# Altium PCB Wristband-EH-v1.PcbDoc
Units mil, origin at the board's own origin, x right, y up, seen from the top; angles counter-clockwise.
Board outline 1000 x 930 mil, 2 copper layers (Top Layer, Bottom Layer); 25 components, 16 nets, 85 pads, 13 vias.
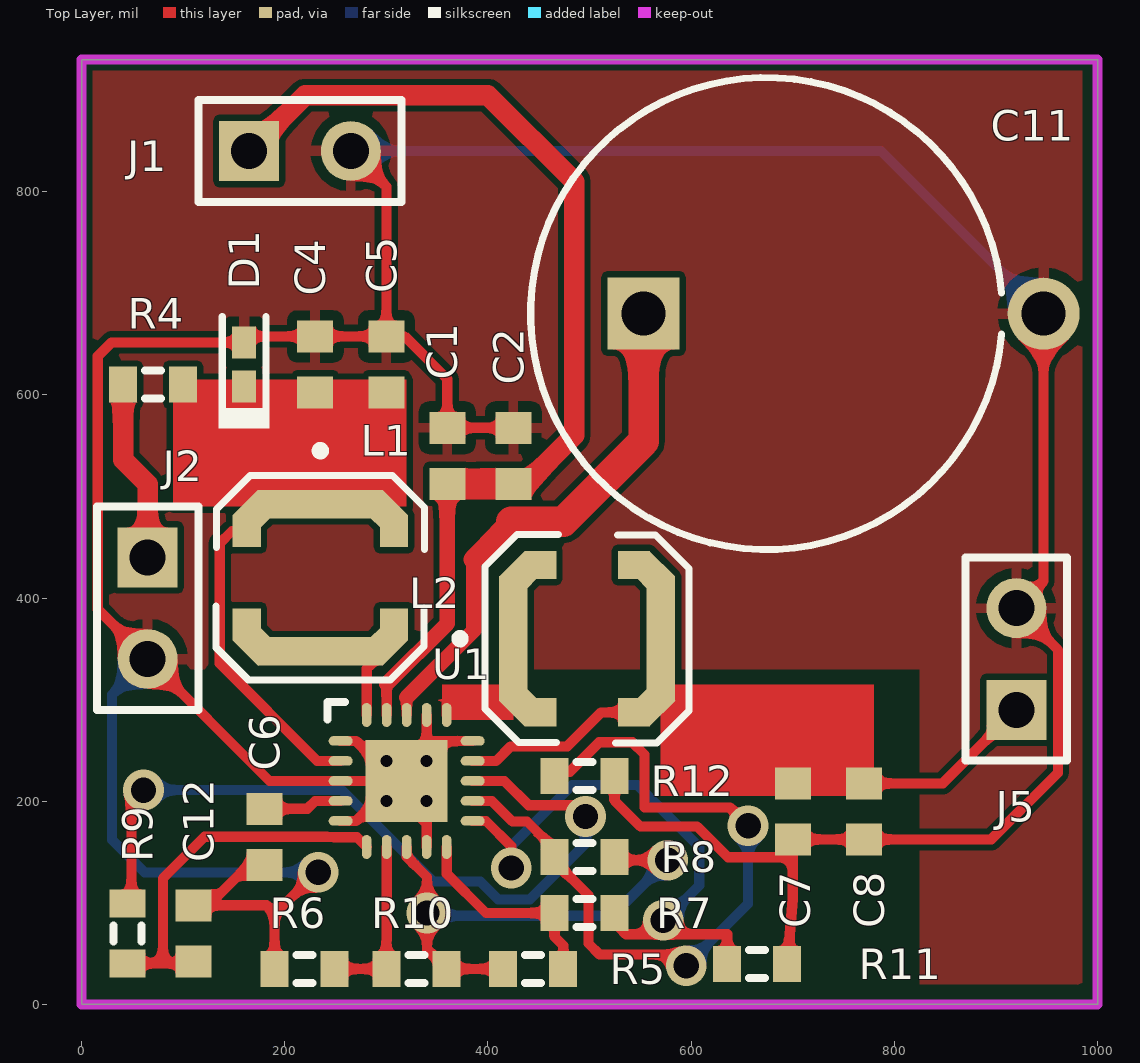
[diagram p0: Top Layer view]
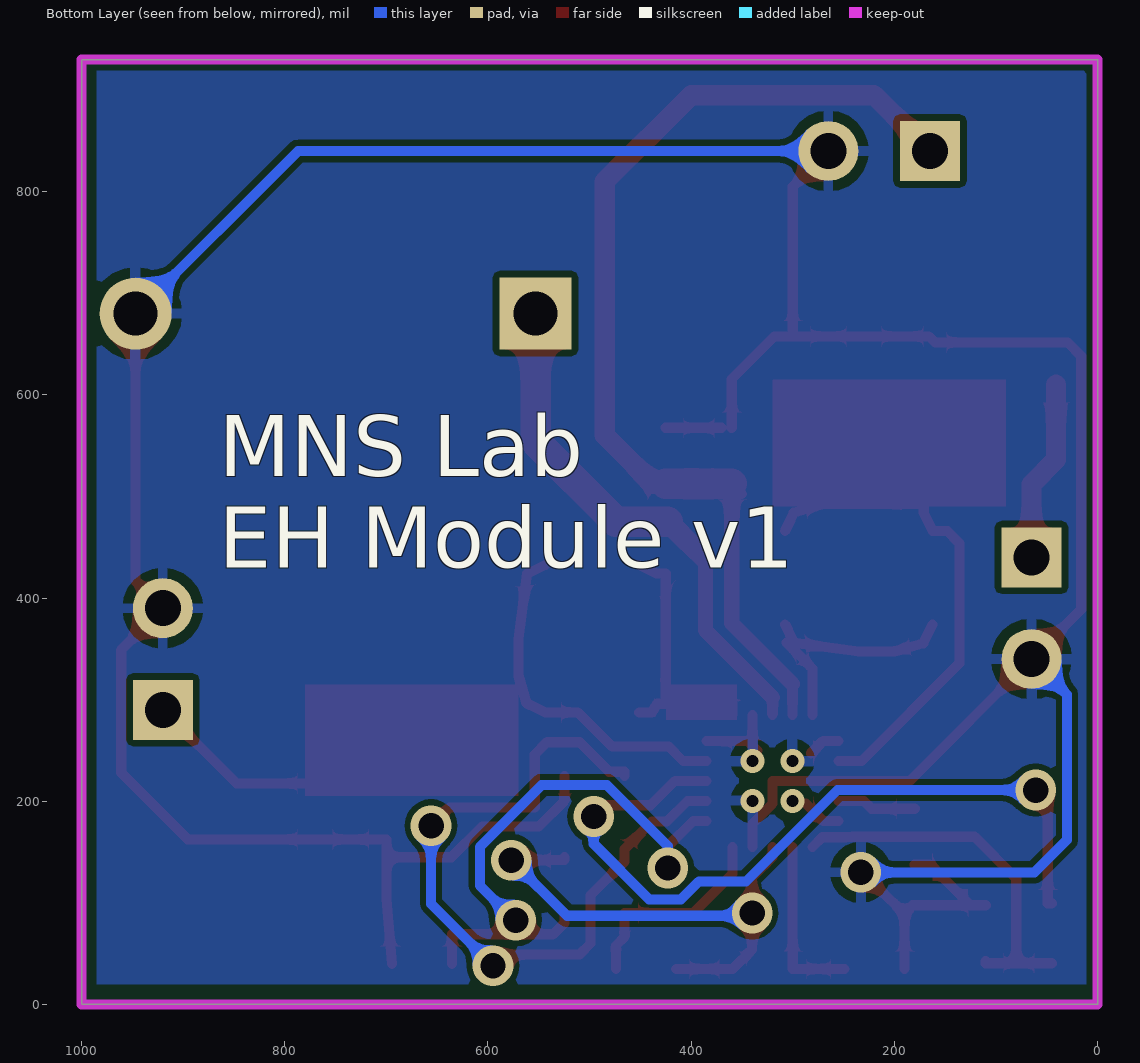
[diagram p1: Bottom Layer view, seen from below]

## Layer stack, top to bottom
Top Solder: solder mask 0.4, Solder Resist, Dk 3.5
Top Layer: signal copper 1.4
Dielectric 1: dielectric 12.6, FR-4, Dk 4.8
Bottom Layer: signal copper 1.4
Bottom Solder: solder mask 0.4, Solder Resist, Dk 3.5

## Board outline
0,0 0,930 1000,930 1000,0

## Design rules (kind name [scope] priority, off if disabled: settings)
Clearance [All] p1: gap=6 ignorepadtopadclearanceinfootprint=FALSE
HoleSize [All] p1: absolutevalues=TRUE maxlimit=100 minlimit=11.81 maxpercent=80.000 minpercent=20.000
PolygonConnect [All] p1: connectstyle=Relief reliefconductorwidth=10 reliefentries=4 polygonreliefangle="90 Angle" airgapwidth=10
RoutingVias [All] p1: holewidth=25 width=40 viastyle="Through Hole" minholewidth=28 minwidth=50 maxholewidth=28 maxwidth=50
SolderMaskExpansion [All] p1: expansion=4
Width [All] p1: maxlimit=40 minlimit=10 preferedwidth=10
29 further rules are at their usual default settings.

## Components (designator, comment, footprint, x,y, rotation, side; value= is the part's Value field where it differs from the comment)
C1 "C1005X5R0J475M050BC" 1608[0603] 360,540 r90 top value=4.7uF
C2 "GRM155R71A104KA01D" 1608[0603] 425,540 r90 top value=0.1uF
C4 "GRM155R71A104KA01D" 1608[0603] 230,630 r90 top value=0.1uF
C5 "C1005X5R0J475M050BC" 1608[0603] 300,630 r90 top value=4.7uF
C6 "GRM155R61A103KA01D" 1608[0603] 180,165 r270 top value=0.01uF
C7 "CL10A226MP8NUNE" 1608[0603] 700,190 r270 top value=22uF
C8 "GRM155R71A104KA01D" 1608[0603] 770,190 r270 top value=0.1uF
C11 "DX-5R5H473U" DX-H_1150x500 750,680 r0 top value=47000uF
C12 "C1005X5R0J105M" 1608[0603] 110,70 r90 top value=1uF
D1 "BZT52C4V7T-7" SOD-523 160,630 r90 top value=4.7V
J1 "90120-0122" HDR1X2 165,840 r0 top
J2 "90120-0122" HDR1X2 65,440 r270 top
J5 "90120-0122" HDR1X2 920,290 r90 top
L1 "LPS4018-223MLB" LPS4018 235,420 r270 top value=22uH
L2 "LPS4018-103MLB" LPS4018 497.5,360 r0 top value=10uH
R4 "CRCW0402100RJNED" J1-0603 70.47,610 r0 top value=100
R5 "CRCW06033M01FKEA" J1-0603 444.53,35 r180 top value=3.01Meg
R6 "CRCW06035M62FKEA" J1-0603 219.53,35 r0 top value=5.62Meg
R7 "CRCW06035M90FKEA" J1-0603 495,90 r180 top value=5.90Meg
R8 "CRCW06037M87FKEA" J1-0603 495,145 r0 top value=7.87Meg
R9 "CRCW06031M24FKEA" J1-0603 45,70 r90 top value=1.24Meg
R10 "CRCW06037M32FKEA" J1-0603 329.53,35 r0 top value=7.32Meg
R11 "CRCW06034M02FKEA" J1-0603 665,40 r180 top value=4.02Meg
R12 "CRCW06035M36FKEA" J1-0603 495,225 r180 top value=5.36Meg
U1 "BQ25570RGR" RGR0020A 320,220 r0 top

## Footprints (in the part's own frame and the unit in brackets; to place one, negate y for a bottom-side part, rotate by r counter-clockwise, add the part's x,y. Pads: shape width x height; smd on the part's side, far side on the other; paste and mask are expansions set on the pad)
1608[0603] [mm] "Chip Capacitor, Body 1.6x0.8mm, IPC High Density"
  rect 0.8x0.9 smd: 1(-0.7,0) 2(0.7,0)
  body extent -0.87,-0.48 0.87,0.48, height 1.3
DX-H_1150x500 [mm] "Elna horizontal SUPERCAP"
  rect 1.8x1.8 hole 1.1: 1(-5,0)
  round 1.8 hole 1.1: 2(5,0)
  silkscreen extent -7.82,-5.9 3.95,5.9, body extent -7.82,-5.9 5.07,5.9, height 5.5
HDR1X2 [mm] "Connector; Header; 2 Position"
  rect 1.5x1.5 hole 0.9: 1(0,0)
  round 1.5 hole 0.9: 2(2.54,0)
  silkscreen extent -1.27,-1.27 3.81,1.27
J1-0603 [mm] "Chip Resistor, Body 1.6x0.8mm, IPC High Density"
  rect 0.7x0.9 smd: 1(-0.75,0) 2(0.75,0)
  silkscreen extent -0.2,-0.35 0.2,0.35, body extent -0.85,-0.48 0.85,0.48, height 0.9
LPS4018 [mil]
  rect 28x123 smd: 1(-72.5,0) 2(72.5,0)
  rect 35.5x28 smd rot 45: 1(-64,64) 2(64.5,-63.5)
  rect 35.5x28 smd rot 135: 1(-64,-64) 2(64,64)
  rect 31.5x28 smd: 1(-46,72.5) 1(-46,-72.5) 2(46,72.5) 2(46,-72.5)
  silkscreen extent -129,-102 101,102, body extent -81,-81 81,81, height 71
RGR0020A [mm] "QFN, 20-Leads, Body 3.5x3.5mm, Pitch 0.5mm, Thermal Pad 2.05x2.05mm, TI Recommended"
  oval 0.6x0.24 smd paste-0.025 mask+0.07: 1(-1.65,1) 2(-1.65,0.5) 3(-1.65,0) 4(-1.65,-0.5) 5(-1.65,-1) 11(1.65,-1) 12(1.65,-0.5) 13(1.65,0) 14(1.65,0.5) 15(1.65,1)
  oval 0.24x0.6 smd paste-0.025 mask+0.07: 6(-1,-1.65) 7(-0.5,-1.65) 8(0,-1.65) 9(0.5,-1.65) 10(1,-1.65) 16(1,1.65) 17(0.5,1.65) 18(0,1.65) 19(-0.5,1.65) 20(-1,1.65)
  rect 2.05x2.05 smd paste-1.025 mask+0.07: 21(0,0)
  silkscreen extent -1.97,1.54 -1.54,1.97, body extent -1.83,-1.83 1.83,1.83, height 1.01
SOD-523 [mm] "NXP Semiconductor recommended land pattern, nominal STEP model"
  rect 0.8x0.6 smd paste-0.05: 1(-0.55,0) 2(0.55,0)
  silkscreen extent -1.6,-0.64 1.2,0.63, body extent -0.8,-0.4 0.8,0.4, height 0.72

## Part data
C1 C5: "CAP, CERM, 4.7uF, 6.3V, +/-20%, X5R, 0402", Cap_Case=0402, Manufacturer=TDK, Supplier Part Number 1=445-7395-1-ND, TempCo=X5R, Tolerance_%=20, Value1=Unknown, Value2=6.3V, ValueDisplayed=4.7µF, Cap_F=0.0000047, ComponentLink1Description="Datasheet link", ComponentLink1URL=http://www.tdk.com/pdf/TDKMLCCCapRange.pdf, CompType=Capacitor, LatestRevisionDate=2013-09-06, MountType=SMT, PackageReference=0402, PartNumber=C1005X5R0J475M050BC, Polarized=N, Published=2008-06-19, Publisher="Texas Instruments", RoHS=Y, Supplier 1=Digi-Key, Supplier 2=Farnell, Supplier 3=Newark, Supplier Part Number 2=1962109, Supplier Part Number 3=48T2906, SymbolVersion=2008-07-09, TaMax_C=85, TaMin_C=-55, Technology=Ceramic, U/M=EA, VDC_V=6.3
C2 C4 C8: "CAP, CERM, 0.1uF, 10V, +/-10%, X7R, 0402", Cap_Case=0402, Manufacturer=MuRata, Supplier Part Number 1=GRM155R71A104KA01D-ND, TempCo=X7R, Tolerance_%=10, Value1=Unknown, Value2=10V, ValueDisplayed=0.1µF, Cap_F=0.0000001, ComponentLink1Description="Datasheet link", ComponentLink1URL=http://search.murata.co.jp/Ceramy/PnsearchViewAction.do?HnOFG=ON&HnNFG=ON&SEL_CNT=50&sLang=en&sKey=GRM155R71A104KA01D&x=9&y=9&search=startwith, CompType=Capacitor, LatestRevisionDate=2013-09-06, MountType=SMT, PackageReference=0402, PartNumber=GRM155R71A104KA01D, Polarized=N, Published=2008-06-19, Publisher="Texas Instruments", RoHS=Y, Supplier 1=Digi-Key, Supplier 2=Mouser, Supplier 3=Farnell, Supplier Part Number 2=81-GRM155R71A104KA1D, Supplier Part Number 3=1828860, SymbolVersion=2008-07-09, TaMax_C=125, TaMin_C=-55, Technology=Ceramic, U/M=EA, VDC_V=10
C6: "CAP, CERM, 0.01uF, 10V, +/-10%, X5R, 0402", Cap_Case=0402, Manufacturer=MuRata, Supplier Part Number 1=GRM155R61A103KA01D-ND, TempCo=X5R, Tolerance_%=10, Value1=Unknown, Value2=10V, ValueDisplayed=0.01µF, Cap_F=0.00000001, ComponentLink1Description="Datasheet link", ComponentLink1URL=http://search.murata.co.jp/Ceramy/PnsearchViewAction.do?HnOFG=ON&HnNFG=ON&SEL_CNT=50&sLang=en&sKey=GRM155R61A103KA01D&x=9&y=9&search=startwith, CompType=Capacitor, LatestRevisionDate=2013-09-06, MountType=SMT, PackageReference=0402, PartNumber=GRM155R61A103KA01D, Polarized=N, Published=2008-06-19, Publisher="Texas Instruments", RoHS=Y, Supplier 1=Digi-Key, Supplier 2=Mouser, Supplier Part Number 2=81-GRM155R61A103KA1D, SymbolVersion=2008-07-09, TaMax_C=85, TaMin_C=-55, Technology=Ceramic, U/M=EA, VDC_V=10
C7: "CAP, CERM, 22uF, 10V, +/-20%, X5R, 0603", Cap_Case=0603, Manufacturer=Samsung, Supplier Part Number 1=1276-1274-1-ND, TempCo=X5R, Tolerance_%=20, Value1=Unknown, Value2=10V, ValueDisplayed=22µF, Cap_F=0.000022, ComponentLink1Description="Datasheet link", ComponentLink1URL=http://www.samsungsem.com/servlet/FileDownload?type=spec&file=CL10A226MP8NUNE.pdf, CompType=Capacitor, LatestRevisionDate=2013-09-06, MountType=SMT, PackageReference=0603, PartNumber=CL10A226MP8NUNE, Polarized=N, Published=2008-06-19, Publisher="Texas Instruments", RoHS=Y, Supplier 1=Digi-Key, SymbolVersion=2008-07-09, TaMax_C=85, TaMin_C=-55, Technology=Ceramic, U/M=EA, VDC_V=10
C11: "CAP, Electric Double Layer, 47000uF, 5.5V, +80/-20%, TH", Manufacturer=Elna, Supplier Part Number 1=604-1021-ND, Tolerance_%=80, Value1=Unknown, Value2=5.5V, ValueDisplayed=47000µF, Cap_F=0.047, ComponentLink1Description="Datasheet link", ComponentLink1URL=http://www.elna.co.jp/en/capacitor/double_layer/catalog/pdf/dx_e.pdf, CompType=Capacitor, LatestRevisionDate=2013-09-03, MountType=TH, PackageReference="Horizontal D11.5x5mm", PartNumber=DX-5R5H473U, Polarized=Y, Publisher="Texas Instruments", RoHS=Y, Series=DX, Supplier 1=Digi-Key, Supplier 2=Mouser, Supplier Part Number 2=555-DX-5R5H473U, SymbolVersion=2008-07-09, TaMax_C=70, TaMin_C=-25, Technology="Electric Double Layer", U/M=EA, VDC_V=5.5
C12: "CAP, CERM, 1uF, 6.3V, +/-20%, X5R, 0402", Cap_Case=0402, Manufacturer=TDK, Supplier Part Number 1=445-1415-1-ND, TempCo=X5R, Tolerance_%=20, Value1="0.0079 ohm", Value2=6.3V, ValueDisplayed=1µF, Cap_F=0.000001, ComponentLink1Description="Datasheet link", ComponentLink1URL=http://www.tdk.co.jp/tefe02/e412_c.pdf, CompType=Capacitor, ESR_Ohm=0.0079, LatestRevisionDate=2013-11-25, MountType=SMT, PackageReference=0402, PartNumber=C1005X5R0J105M, Polarized=N, Published=2008-06-19, Publisher="Texas Instruments", RoHS=Y, Supplier 1=Digi-Key, Supplier 2=Farnell, Supplier Part Number 2=1844107, SymbolVersion=2008-07-09, TaMax_C=85, TaMin_C=-55, Technology=Ceramic, U/M=EA, VDC_V=6.3
D1: "Diode, Zener, 4.7V, 300mW, SOD-523", Manufacturer="Diodes Inc.", Power_W=0.3, Supplier Part Number 1=BZT52C4V7T-7DICT-ND, Value1=0.3W, ComponentLink1Description="Datasheet link", ComponentLink1URL=http://www.diodes.com/datasheets/ds30502.pdf, CompType=Zener, LatestRevisionDate=2013-09-09, LatestRevisionNote="Updated Supplier Data", MountType=SMT, PackageReference=SOD-523, PartNumber=BZT52C4V7T-7, Published=2008-10-08, Publisher="Texas Instruments", RJA_CperW=417, RoHS=Y, Supplier 1=Digi-Key, Supplier 2=Mouser, Supplier Part Number 2=621-BZT52C4V7T-7, SymbolVersion=2010-08-25, U/M=EA, Vr_V=N/A, Vz_V=4.7
J1 J2 J5: "Header, 100mil, 2x1, Tin plated, TH", Manufacturer=Molex, Supplier Part Number 1=WM8072-ND, ComponentLink1Description="Datasheet Link", ComponentLink1URL=http://www.molex.com/pdm_docs/sd/901200122_sd.pdf, CompType=Header, LatestRevisionDate=2013-09-12, MountType=TH, PackageReference="Header 2x1", PartNumber=90120-0122, Publisher="Texas Instruments", RoHS=Y, Supplier 1=Digi-Key, Supplier 2=Mouser, Supplier 3=Newark, Supplier Part Number 2=538-90120-0122, Supplier Part Number 3=19M8215, SymbolCreator=a0412235, SymbolVersion=2013-03-14, U/M=EA
L1: "Inductor, Shielded Drum Core, Ferrite, 22uH, 0.83A, 0.36 ohm, SMD", Manufacturer=Coilcraft, Value1="0.36 ohm", Value2=0.83A, ValueDisplayed=22µH, ComponentLink1Description="Datasheet link", ComponentLink1URL=http://www.coilcraft.com/pdfs/lps4018.pdf, CompType=Inductor, DCR_ohm=0.36, Imax_A=0.83, Ind_H=22.0E-6, Irms="0.9A @ 40C rise", Isat="0.83A @ 30% inductance drop", LatestRevisionDate=2013-09-15, Material=Ferrite, MountType=SMT, PackageReference=LPS4018, PartNumber=LPS4018-223MLB, Published=2008-06-26, Publisher="Texas Instruments", RoHS=Y, SymbolVersion=2008-07-23, Technology="Shielded Drum Core", U/M=EA
L2: "Inductor, Shielded Drum Core, Ferrite, 10uH, 1.25A, 0.2 ohm, SMD", Manufacturer=Coilcraft, Value1="0.2 ohm", Value2=1.25A, ValueDisplayed=10µH, ComponentLink1Description="Datasheet link", ComponentLink1URL=http://www.coilcraft.com/pdfs/lps4018.pdf, CompType=Inductor, DCR_ohm=0.2, Imax_A=1.25, Ind_H=10.0E-6, Irms="1.25A @ 40C rise", Isat="1.3A @ 30% inductance drop", LatestRevisionDate=2013-09-15, Material=Ferrite, MountType=SMT, PackageReference=LPS4018, PartNumber=LPS4018-103MLB, Published=2008-06-26, Publisher="Texas Instruments", RoHS=Y, SymbolVersion=2008-07-23, Technology="Shielded Drum Core", U/M=EA
R4: "RES, 100 ohm, 5%, 0.063W, 0402", Manufacturer=Vishay-Dale, Power_W=0.063, Supplier Part Number 1=541-100JCT-ND, TempCo="200 ppm/C", Tolerance_%=5, Value1=5%, Value2=0.063W, Value_Code=100R, ComponentLink1Description="Datasheet link", ComponentLink1URL=http://www.vishay.com/docs/20035/dcrcwe3.pdf, CompType=Resistor, EIA_Code=E24, LatestRevisionDate=2013-01-08, MountType=SMT, PackageReference=0402, PartNumber=CRCW0402100RJNED, Published=2008-06-26, Publisher="Texas Instruments", Res_ohm=100, RoHS=Y, Supplier 1=Digi-Key, Supplier 2=Mouser, Supplier 3=Farnell, Supplier Part Number 2=71-CRCW0402J-100-E3, Supplier Part Number 3=1652740, SymbolVersion=2009-05-29, Technology="Thick Film", U/M=EA, VDC_V=50
R5: "RES, 3.01Meg ohm, 1%, 0.1W, 0603", Manufacturer=Vishay-Dale, Power_W=0.1, Supplier Part Number 1=541-3.01MHCT-ND, TempCo="100 ppm/C", Tolerance_%=1, Value1=1%, Value2=0.1W, Value_Code=3M01, ComponentLink1Description="Datasheet link", ComponentLink1URL=http://www.vishay.com/docs/20035/dcrcwe3.pdf, CompType=Resistor, EIA_Code=E96, LatestRevisionDate=2013-08-23, MountType=SMT, PackageReference=0603, PartNumber=CRCW06033M01FKEA, Published=2008-06-26, Publisher="Texas Instruments", Res_ohm=3010000, RoHS=Y, Supplier 1=Digi-Key, Supplier 2=Mouser, Supplier 3=Farnell, Supplier Part Number 2=71-CRCW0603-3.01M-E3, Supplier Part Number 3=1878630, SymbolVersion=2009-05-29, Technology="Thick Film", U/M=EA, VDC_V=75
R6: "RES, 5.62Meg ohm, 1%, 0.1W, 0603", Manufacturer=Vishay-Dale, Power_W=0.1, Supplier Part Number 1=541-5.62MHCT-ND, TempCo="100 ppm/C", Tolerance_%=1, Value1=1%, Value2=0.1W, Value_Code=5M62, ComponentLink1Description="Datasheet link", ComponentLink1URL=http://www.vishay.com/docs/20035/dcrcwe3.pdf, CompType=Resistor, EIA_Code=E96, LatestRevisionDate=2013-08-23, MountType=SMT, PackageReference=0603, PartNumber=CRCW06035M62FKEA, Published=2008-06-26, Publisher="Texas Instruments", Res_ohm=5620000, RoHS=Y, Supplier 1=Digi-Key, Supplier 2=Mouser, Supplier Part Number 2=71-CRCW06035M62FKEA, SymbolVersion=2009-05-29, Technology="Thick Film", U/M=EA, VDC_V=75
R7: "RES, 5.90Meg ohm, 1%, 0.1W, 0603", Manufacturer=Vishay-Dale, Power_W=0.1, Supplier Part Number 1=541-5.90MHCT-ND, TempCo="100 ppm/C", Tolerance_%=1, Value1=1%, Value2=0.1W, Value_Code=5M90, ComponentLink1Description="Datasheet link", ComponentLink1URL=http://www.vishay.com/docs/20035/dcrcwe3.pdf, CompType=Resistor, EIA_Code=E96, LatestRevisionDate=2013-08-23, MountType=SMT, PackageReference=0603, PartNumber=CRCW06035M90FKEA, Published=2008-06-26, Publisher="Texas Instruments", Res_ohm=5900000, RoHS=Y, Supplier 1=Digi-Key, Supplier 2=Mouser, Supplier Part Number 2=71-CRCW06035M90FKEA, SymbolVersion=2009-05-29, Technology="Thick Film", U/M=EA, VDC_V=75
R8: "RES, 7.87Meg ohm, 1%, 0.1W, 0603", Manufacturer=Vishay-Dale, Power_W=0.1, Supplier Part Number 1=541-7.87MHCT-ND, TempCo="100 ppm/C", Tolerance_%=1, Value1=1%, Value2=0.1W, Value_Code=7M87, ComponentLink1Description="Datasheet link", ComponentLink1URL=http://www.vishay.com/docs/20035/dcrcwe3.pdf, CompType=Resistor, EIA_Code=E96, LatestRevisionDate=2013-08-23, MountType=SMT, PackageReference=0603, PartNumber=CRCW06037M87FKEA, Published=2008-06-26, Publisher="Texas Instruments", Res_ohm=7870000, RoHS=Y, Supplier 1=Digi-Key, Supplier 2=Mouser, Supplier Part Number 2=71-CRCW06037M87FKEA, SymbolVersion=2009-05-29, Technology="Thick Film", U/M=EA, VDC_V=75
R9: "RES, 1.24Meg ohm, 1%, 0.1W, 0603", Manufacturer=Vishay-Dale, Power_W=0.1, Supplier Part Number 1=541-1.24MHCT-ND, TempCo="100 ppm/C", Tolerance_%=1, Value1=1%, Value2=0.1W, Value_Code=1M24, ComponentLink1Description="Datasheet link", ComponentLink1URL=http://www.vishay.com/docs/20035/dcrcwe3.pdf, CompType=Resistor, EIA_Code=E96, LatestRevisionDate=2013-08-23, MountType=SMT, PackageReference=0603, PartNumber=CRCW06031M24FKEA, Published=2008-06-26, Publisher="Texas Instruments", Res_ohm=1240000, RoHS=Y, Supplier 1=Digi-Key, Supplier 2=Mouser, Supplier 3=Farnell, Supplier Part Number 2=71-CRCW06031M24FKEA, Supplier Part Number 3=1892084, SymbolVersion=2009-05-29, Technology="Thick Film", U/M=EA, VDC_V=75
R10: "RES, 7.32Meg ohm, 1%, 0.1W, 0603", Manufacturer=Vishay-Dale, Power_W=0.1, Supplier Part Number 1=541-7.32MHCT-ND, TempCo="100 ppm/C", Tolerance_%=1, Value1=1%, Value2=0.1W, Value_Code=7M32, ComponentLink1Description="Datasheet link", ComponentLink1URL=http://www.vishay.com/docs/20035/dcrcwe3.pdf, CompType=Resistor, EIA_Code=E96, LatestRevisionDate=2013-08-23, MountType=SMT, PackageReference=0603, PartNumber=CRCW06037M32FKEA, Published=2008-06-26, Publisher="Texas Instruments", Res_ohm=7320000, RoHS=Y, Supplier 1=Digi-Key, Supplier 2=Mouser, Supplier Part Number 2=71-CRCW06037M32FKEA, SymbolVersion=2009-05-29, Technology="Thick Film", U/M=EA, VDC_V=75
R11: "RES, 4.02Meg ohm, 1%, 0.1W, 0603", Manufacturer=Vishay-Dale, Power_W=0.1, Supplier Part Number 1=541-4.02MHCT-ND, TempCo="100 ppm/C", Tolerance_%=1, Value1=1%, Value2=0.1W, Value_Code=4M02, ComponentLink1Description="Datasheet link", ComponentLink1URL=http://www.vishay.com/docs/20035/dcrcwe3.pdf, CompType=Resistor, EIA_Code=E96, LatestRevisionDate=2013-08-23, MountType=SMT, PackageReference=0603, PartNumber=CRCW06034M02FKEA, Published=2008-06-26, Publisher="Texas Instruments", Res_ohm=4020000, RoHS=Y, Supplier 1=Digi-Key, Supplier 2=Mouser, Supplier 3=Farnell, Supplier Part Number 2=71-CRCW06034M02FKEA, Supplier Part Number 3=1570744, SymbolVersion=2009-05-29, Technology="Thick Film", U/M=EA, VDC_V=75
R12: "RES, 5.36Meg ohm, 1%, 0.1W, 0603", Manufacturer=Vishay-Dale, Power_W=0.1, Supplier Part Number 1=541-5.36MHCT-ND, TempCo="100 ppm/C", Tolerance_%=1, Value1=1%, Value2=0.1W, Value_Code=5M36, ComponentLink1Description="Datasheet link", ComponentLink1URL=http://www.vishay.com/docs/20035/dcrcwe3.pdf, CompType=Resistor, EIA_Code=E96, LatestRevisionDate=2013-08-23, MountType=SMT, PackageReference=0603, PartNumber=CRCW06035M36FKEA, Published=2008-06-26, Publisher="Texas Instruments", Res_ohm=5360000, RoHS=Y, Supplier 1=Digi-Key, Supplier 2=Mouser, Supplier Part Number 2=71-CRCW06035M36FKEA, SymbolVersion=2009-05-29, Technology="Thick Film", U/M=EA, VDC_V=75
U1: "Ultra Low Power Harvester Power Management IC with Boost Charger, and Nano-Powered Buck Converter, RGR0020A", Alternate Manufacturer=None, Manufacturer="Texas Instruments", ComponentLink1Description="Datasheet Link", ComponentLink1URL=https://sps06.itg.ti.com/sites/KMS/crossdivteams/altium/docs/ComponentDatasheets/bq25570_DS_SLUSBH2_20130619.pdf, CompType=IC, LatestRevisionDate=2013-09-13, LatestRevisionNote="Added Parts", MountType=SMT, PackageReference=RGR0020A, PartNumber=BQ25570RGR, Publisher="Texas Instruments", RoHS=Y, SymbolCreator=a0412235, SymbolVersion=2013-01-16, U/M=EA

## Via types
v1: diameter 40, hole 25, Top Layer to Bottom Layer, 9 vias
v2: diameter 23.62, hole 11.81, Top Layer to Bottom Layer, 4 vias

## Nets (pads, with @x,y where several pads share a name; then routed paths per layer and width w, separated by ;. In a path a pad name is that pad's centre, name@x,y a point inside that pad or via, vN(x,y) a via of type N, cw(c..) or ccw(c..) an arc to the next point about the centre after c; other vN are vias at no path point)
GND: C1.2 C2.2 C4.2 C5.2 C6.2 C7.2 C8.2 C11.2 C12.2 D1.2 J1.2 J2.2 J5.2 R6.1 R11.1 R12.1 U1.1 U1.3 U1.5 U1.9 U1.15 U1.17 U1.21 | length 4060.4
  Top Layer w10: C12.2 C12.2@125,97.56 ; C6.2 164.88,137.44 C12.2@125,97.56 ; R6.1 190,89.56 ; v1(233,130) 190,89.56 ; U1.5 270,180.63 U1.21@287.18,197.82 ; U1.1 270,259.37 U1.21@282.18,247.18 ; J1.2 300,805 C5.2 ; U1.21@335,250 U1.21@339.69,254.69 ; U1.9 339.69,178 320,197.69 U1.21 U1.3 185,220 J2.2 16,389 16,638 29.65,651.65 D1.2 165.91,657.56 C4.2 C5.2 ; U1.17 U1.21@339.69,254.69 ; C1.2 360,615.56 318,657.56 C5.2 ; C1.2@370,567.56 C2.2 ; U1.15 344.37,259.37 U1.21@339.69,254.69 ; R12.1 524.53,200.58 550,175.11 605.89,175.11 636.19,144.81 700,144.81 ; R11.1 700,103.47 700,144.81 ; C11.2 946.85,416.85 J5.2 961,349 961,228 895.44,162.44 C8.2 C7.2 700,144.81 ; C12.2@125,97.56 182,97.56 190,89.56
  Bottom Layer w10: J2.2 30,305 30,162 62,130 v1(233,130) ; J1.2 786.85,840 C11.2
  other v2: 300.32,200.32 339.68,200.32 300.32,239.68 339.68,239.68
NetC1_1: C1.1 C2.1 J1.1 U1.19 | length 1039
  Top Layer w10: U1.19 300.31,315.31 ; C1.1@350,502.44 C1.1 ; C2.1 C2.1@437.44,512.44
  Top Layer w15: 300.31,315.31 360,375 C1.1
  Top Layer w20: J1.1 220,895 400,895 485,810 485,560 C2.1@437.44,512.44
  Top Layer w30: C1.1 C2.1
NetC4_1: C4.1 C5.1 D1.1 L1.1 R4.2 U1.2 | length 486.2
  Top Layer w10: U1.2 232,239.69 136,335.69 136,454 148,466 162.5,466 162.5,466.5 171,484 171,492.5 235,492.5 270.5,492.5 299,484 L1.1@307.5,466
NetC6_1: C6.1 U1.4 | length 78.3
  Top Layer w10: C6.1 222.24,192.56 230,200.32 U1.4
NetC7_1: C7.1 C8.1 J5.1 L2.2 U1.14 | length 528
  Top Layer w10: U1.14 408,239.69 422.31,254 478,254 511.5,287.5 543.5,287.5 562,296.5 570,324 570,360 561.5,424 L2.2@543.5,432.5 ; C8.1 847.56,217.56 J5.1
NetC11_1: C11.1 U1.18 | length 521.5
  Top Layer w10: U1.18 320,302
  Top Layer w15: 320,302 386,368 386,438
  Top Layer w20: 386,438 423,475
  Top Layer w30: 423,475 474,475 553.15,554.15 C11.1
NetC12_1: C12.1 R9.1 U1.6 | length 372.2
  Top Layer w10: R9.1 80,40.47 ; C12.1 110,40.47 80,40.47 ; U1.6 271.04,164.63 248.41,164.63 248.14,164.91 241.44,164.91 241.35,165 121,165 80,124 80,40.47
NetJ2_1: J2.1 R4.1 | length 180
  Top Layer w20: R4.1 40.94,536.06 65,512 J2.1
NetL1_2: L1.2 U1.20 | length 258.2
  Top Layer w10: L1.2@162.5,374 171.5,355.5 199.5,347.5 235,347.5 L1.2@299,356 ; U1.20 280.63,330.63 306,356 L1.2@299,356 ; L1.2@307.5,374 L1.2@299,356
NetL2_1: L2.1 U1.16 | length 264.4
  Top Layer w10: U1.16 359.37,296 L2.1@425,296 ; L2.1@451.5,287.5 438.5,287.5 433.5,296 L2.1@425,296 ; L2.1@451.5,432.5 433.5,424 425,424 425,360 L2.1@425,296
NetR5_1: R5.1 R7.2 U1.10 | length 207.1
  Top Layer w10: U1.10 359.37,128.63 398,90 R7.2 465.47,66.58 474.06,58 R5.1
NetR5_2: R5.2 R8.2 R10.2 U1.8 | length 508.4
  Top Layer w10: U1.8 320,145.4 340,125.4 v1(340,90) 340,54.06 R10.2 R5.2 ; R8.2 524.53,142 v1(577,142)
  Bottom Layer w10: v1(340,90) 342.72,87.28 522.28,87.28 v1(577,142)
NetR6_2: R6.2 R10.1 U1.7 | length 171.1
  Top Layer w10: R6.2 R10.1 300,63 300.31,63.31 U1.7
NetR7_1: R7.1 R11.2 U1.11 | length 587.9
  Top Layer w10: U1.11 398,180.63 423,155.63 v1(423,134.28) ; R7.1 524.53,80.47 535.88,69.12 v1@558.79,69.12 ; v1(572.67,83) v1@558.79,69.12 ; R11.2 635.47,69.12 v1@558.79,69.12
  Bottom Layer w10: v1(423,134.28) 423,156 483,216 547,216 608,155 608,117 574,83 v1(572.67,83)
NetR8_1: R8.1 R12.2 U1.12 | length 746.3
  Top Layer w10: U1.12 403.68,200.32 424,180 438.47,180 465.47,153 R8.1 465.47,141 499,107.47 499,60 510,49 584,49 v1(595,38) ; R12.2 465.47,229 480.59,229 509.59,258 542,258 554,246 554,194 638,194 v1(656,176)
  Bottom Layer w10: v1(595,38) 656,99 v1(656,176)
NetR9_2: R9.2 U1.13 | length 775.3
  Top Layer w10: R9.2 49,99.53 49,199 v1(61,211) ; U1.13 416,220 440,196 485,196 v1(496,185)
  Bottom Layer w10: v1(61,211) 256,211 346,121 392.44,121 410.16,103.28 441.28,103.28 496,158 v1(496,185)

## Polygon pours and split planes (outlines as drawn)
GND on Top Layer "Top Layer-No Net" (solid, pour order 4): 10,920 985,920 985,15 980,20 825,20 825,330 15,330 10,335
GND on Bottom Layer "Top Layer-No Net" (solid, pour order 6): 10,915 15,920 985,920 985,20 10,20

## Keep-outs
Keep-Out Layer:
  the board outline again, w10

## Other copper
Top Layer:
  rectangle net NetL2_1: 355,280 425,315
  rectangle net NetC4_1: 90,490 320,615
  rectangle net NetC7_1: 570,205 780,315

## Silkscreen, mask and mechanical layers (free items; w line width, h text height)
Bottom Overlay:
  text "MNS Lab  / EH Module v1" at 865,430 h60
Drill Drawing:
  text ".LEGEND" at 1250,150 h60
  text "Drill Drawing." at 1250,50 h60

## Dimensions
0,0 to 0,930 on Mechanical 1
0,0 to 1000,0 on Mechanical 1